# Altium PCB SensorenUndMPC555.PcbDoc
Units mm, origin at the board's own origin, x right, y up, seen from the top; angles counter-clockwise.
Board outline 130 x 110 mm, 2 copper layers (Top Layer, Bottom Layer); 66 components, 61 nets, 438 pads, 329 vias.
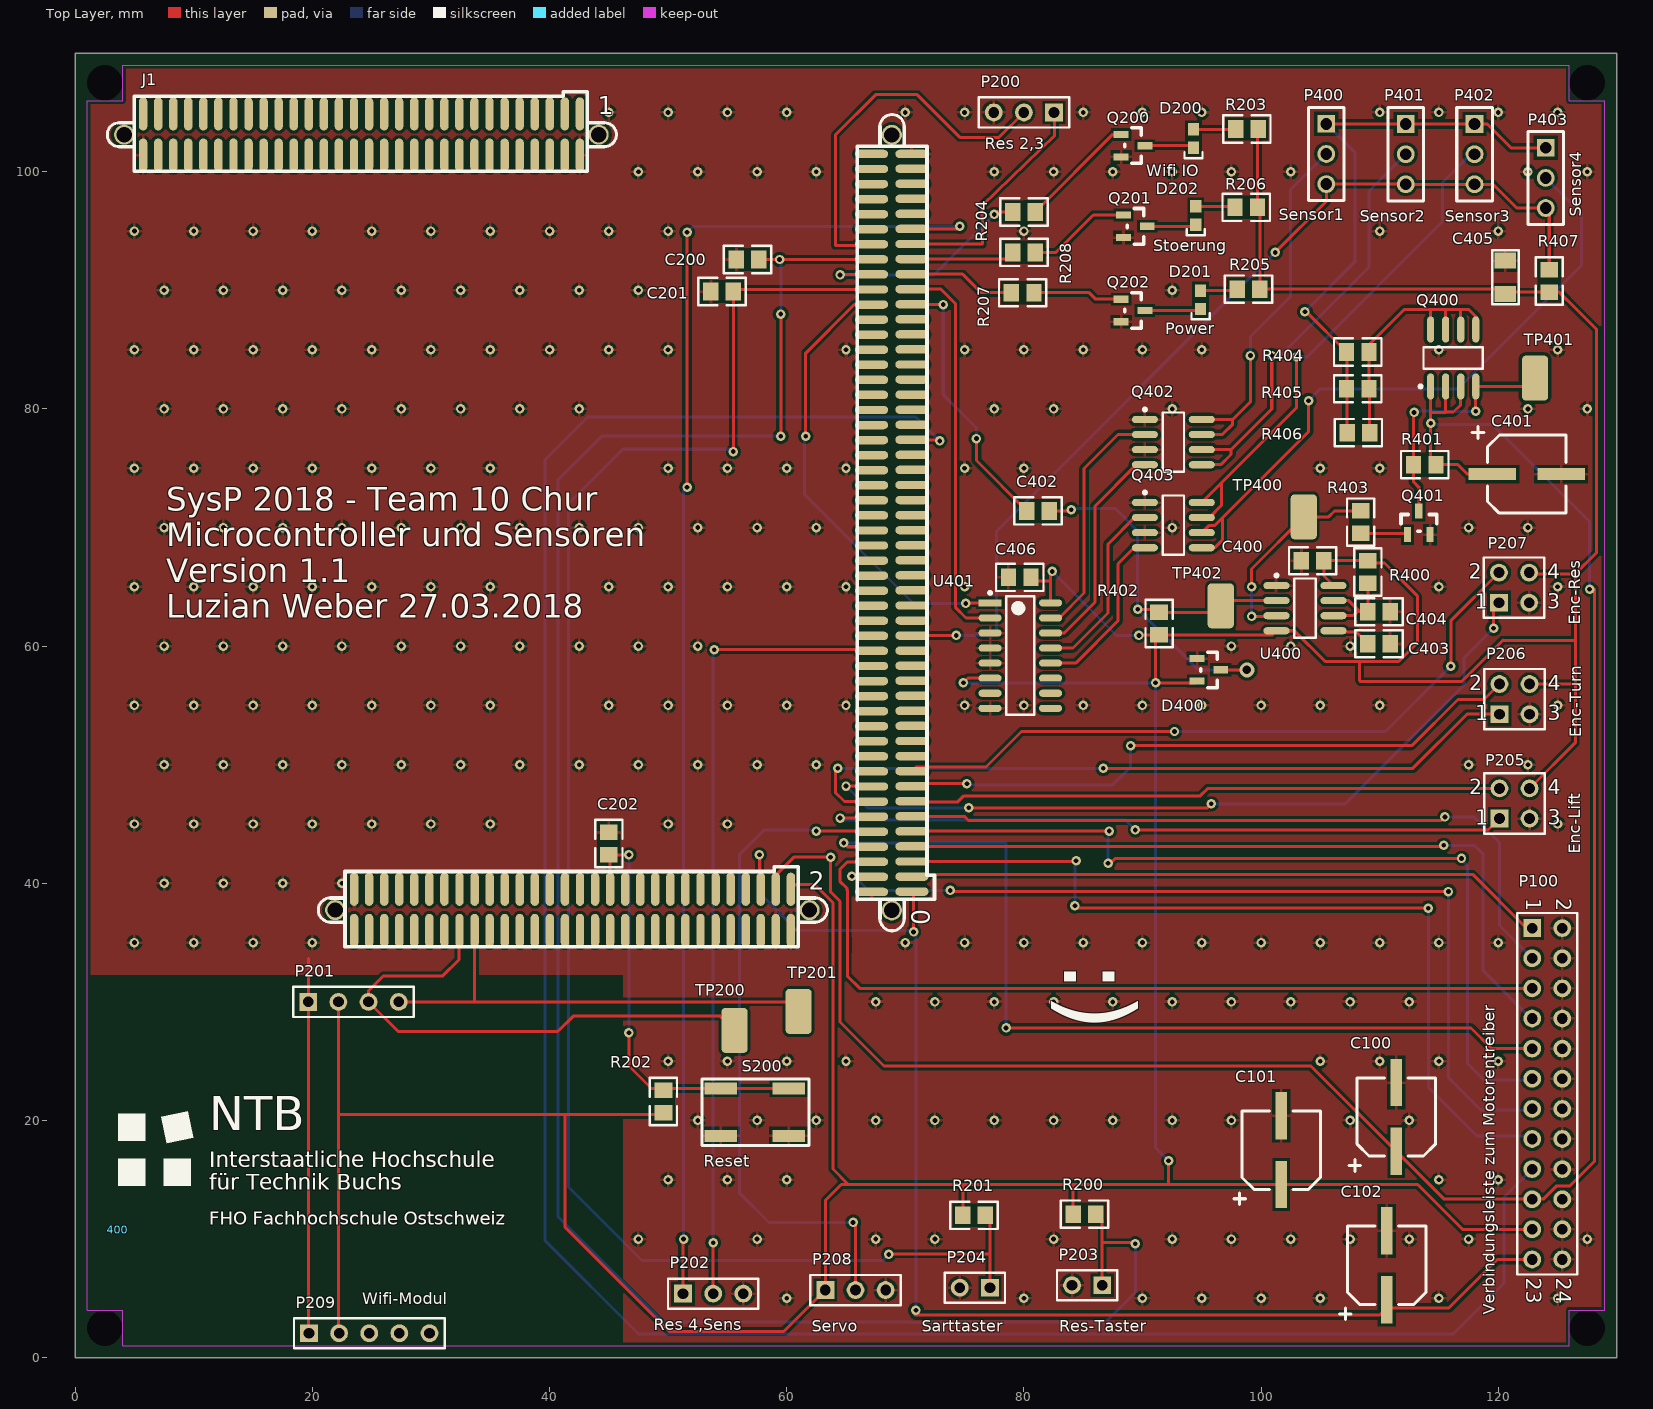
[diagram p0: Top Layer view]
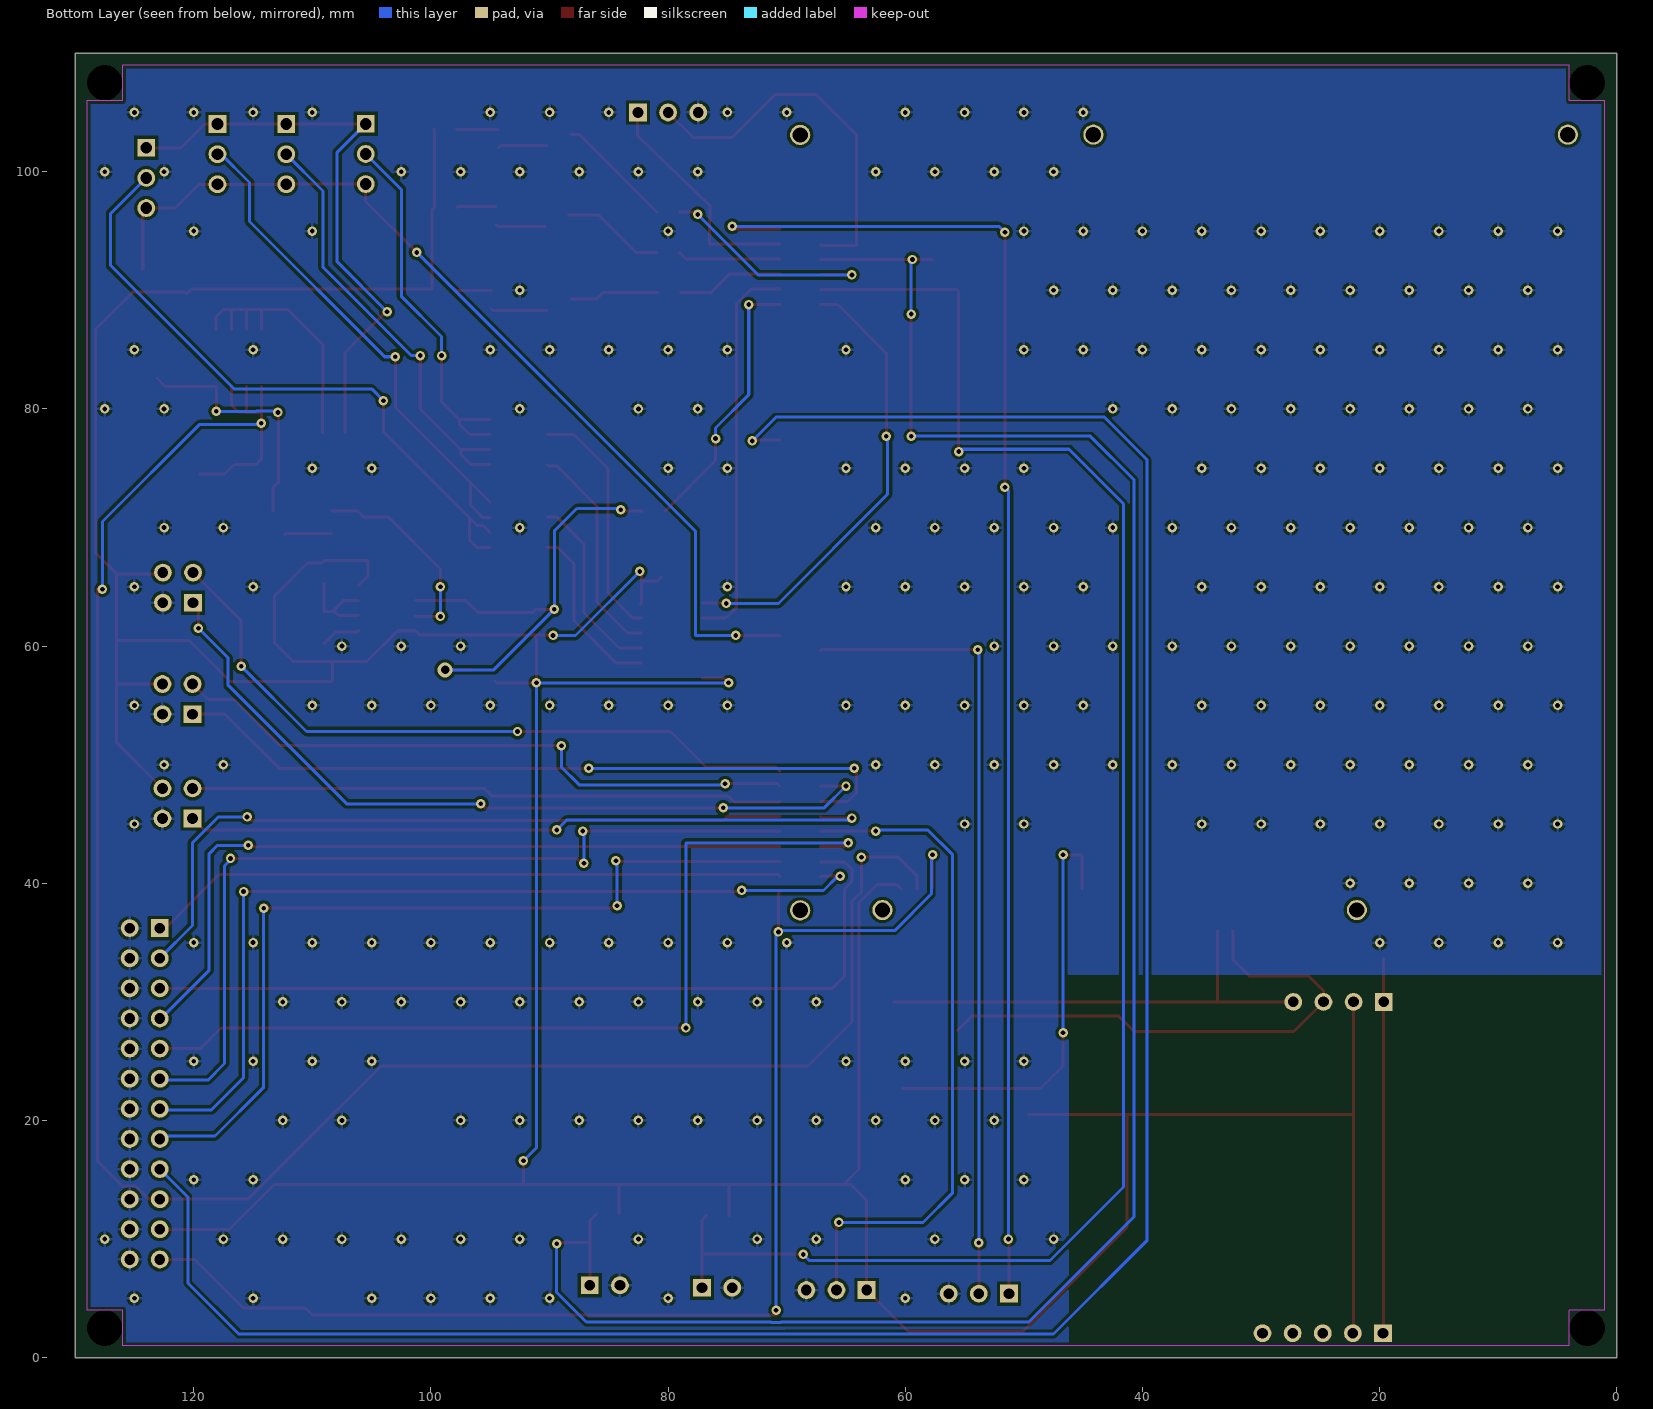
[diagram p1: Bottom Layer view, seen from below]
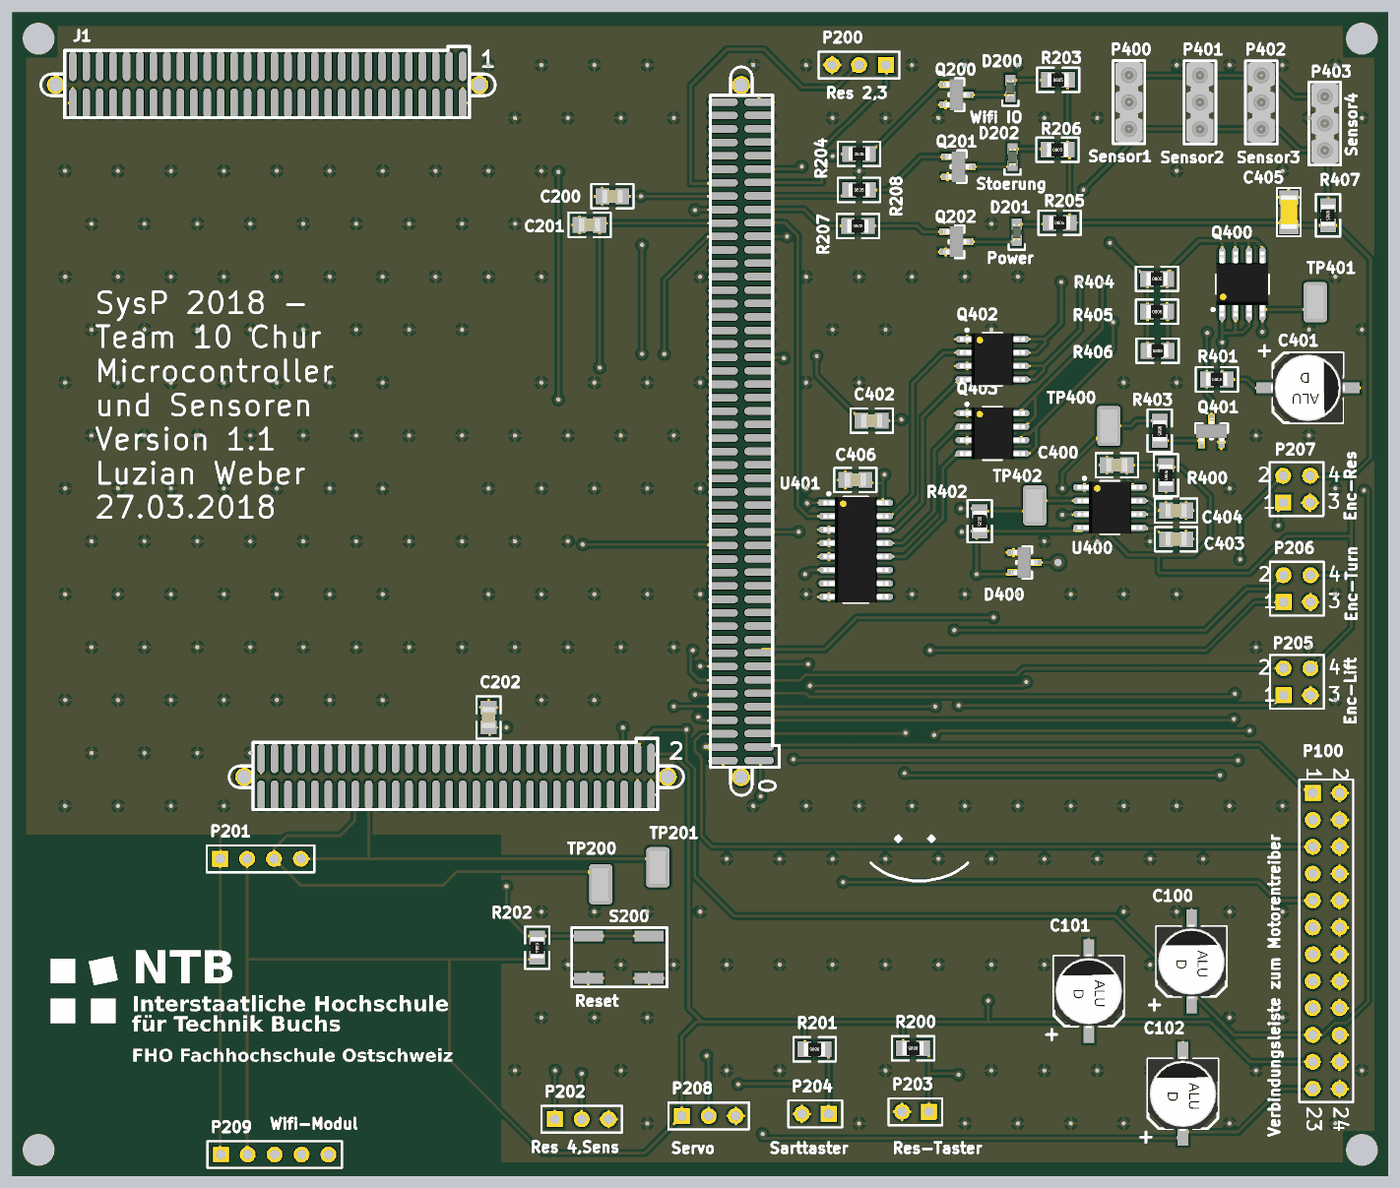
[diagram p2: 3D render of the assembled board from above, using the file's embedded part models]

## Layer stack, top to bottom
Top Solder: solder mask 0.0102, Solder Resist, Dk 3.5
Top Layer: signal copper 0.0356
Dielectric 1: dielectric 0.32, FR-4, Dk 4.8
Bottom Layer: signal copper 0.0356
Bottom Solder: solder mask 0.0102, Solder Resist, Dk 3.5

## Board outline
0,0 130,0 130,110 0,110

## Design rules (kind name [scope] priority, off if disabled: settings)
Clearance [All] p1: gap=0.254 ignorepadtopadclearanceinfootprint=FALSE except(0: Arc-Hole Track-Hole SMDPad-Hole THPad-Hole Via-Hole Fill-Hole Poly-Hole Region-Hole Text-Hole)
HoleSize [All] p1: absolutevalues=TRUE maxlimit=5 minlimit=0.025 maxpercent=80.000 minpercent=20.000
PolygonConnect [All] p1: connectstyle=Relief reliefconductorwidth=0.254 reliefentries=4 polygonreliefangle="90 Angle" airgapwidth=0.254
RoutingVias [All] p1: holewidth=0.711 width=1.27 viastyle="Through Hole" minholewidth=0.711 minwidth=1.27 maxholewidth=0.711 maxwidth=1.27
SolderMaskExpansion [All] p1: expansion=0.102
Width [All] p1: maxlimit=0.254 minlimit=0.254 preferedwidth=0.254
29 further rules are at their usual default settings.

## Classes and differential pairs
component class 4_Sensoren.SchDoc: 400 C400 C401 C402 C403 C404 C405 C406 D400 P400 P401 P402 P403 Q400 Q401 Q402 Q403 R400 R401 R402 R403 R404 R405 R406 R407 TP400 TP401 TP402 U400 U401
component class TopSheet: C100 C101 C102 P100
component class 2_MPC555.SchDoc: C200 C201 C202 D200 D201 D202 J1 J? P200 P201 P202 P203 P204 P205 P206 P207 P208 P209 Q200 Q201 Q202 R200 R201 R202 R203 R204 R205 R206 R207 R208 S200 TP200 TP201

## Components (designator, comment, footprint, x,y, rotation, side; value= is the part's Value field where it differs from the comment)
400 "NTB Logo Medium" "NTB Logo Medium" 3.6,10.8 r0 top
C100 "AVE476M16D16T-F" "CDE_CAP AVE CODE D_H" 111.4,20.3 r0 top value=47uF
C101 "AVE476M16D16T-F" "CDE_CAP AVE CODE D_H" 101.7,17.5 r0 top value=47uF
C102 "AVE476M16D16T-F" "CDE_CAP AVE CODE D_H" 110.6,7.8 r0 top value=47uF
C200 "100nF" CAP-0805[2012] 56.7,92.6 r0 top
C201 "100nF" CAP-0805[2012] 54.55,89.9 r0 top
C202 "100nF" CAP-0805[2012] 45,43.35 r270 top
C400 "100nF" CAP-0805[2012] 104.35,67.2 r180 top
C401 "AVE476M16D16T-F" "CDE_CAP AVE CODE D_H" 122.4,74.5 r270 top value=47uF
C402 "1nF" CAP-0805[2012] 81.2,71.4 r0 top
C403 "100nF" CAP-0805[2012] 109.95,60.2 r0 top
C404 "10nF" CAP-0805[2012] 109.95,62.9 r0 top
C405 "10uF" CAP-1206[3216] 120.6,91.1 r90 top
C406 "100nF" CAP-0805[2012] 79.65,65.8 r180 top
D200 "LTST-C190GKT" "LED 0603 green" 94.3,102.8 r90 top
D201 "LTST-C190GKT" "LED 0603 green" 94.9,89.2 r90 top
D202 "LTST-C190GKT" "LED 0603 green" 94.5,96.3 r90 top
D400 "BAT721S" SOT-23 95.6,58 r90 top
J1 "MPC555 Headerboard" "MPC555 Headerboard SMT" 70.561,39.297 r270 top
P100 "Header 12X2" HDR2X12 122.86,36.22 r270 top
P200 "Header 3" HDR1X3 82.54,105 r180 top
P201 "WIFI_A" HDR1X4 19.66,30 r0 top
P202 "Header 3" HDR1X3 51.26,5.4 r0 top
P203 "Header 2" HDR1X2 86.6,6.1 r180 top
P204 "Header 2" HDR1X2 77.14,5.9 r180 top
P205 "Header 2X2" HDR2X2 120.1,45.46 r0 top
P206 "Header 2X2" HDR2X2 120.1,54.26 r0 top
P207 "Header 2X2" HDR2X2 120.06,63.66 r0 top
P208 "Header 3" HDR1X3 63.26,5.7 r0 top
P209 "WIFI_B" HDR1X5 19.72,2.06 r0 top
P400 "3 Pin Header Buchse" "3PIN HEADER SOCKET 2.54MM" 105.5,104.02 r90 top
P401 "3 Pin Header Buchse" "3PIN HEADER SOCKET 2.54MM" 112.2,104 r90 top
P402 "3 Pin Header Buchse" "3PIN HEADER SOCKET 2.54MM" 118,104 r90 top
P403 "3 Pin Header Buchse" "3PIN HEADER SOCKET 2.54MM" 124,102 r90 top
Q200 "BC846B-7-F" SOT-23 89.2,102.2 r90 top
Q201 "BC846B-7-F" SOT-23 89.4,95.4 r90 top
Q202 "BC846B-7-F" SOT-23 89.2,88.3 r90 top
Q400 "IRF7204PBF" SOIC-8 116.2,84.3 r90 top
Q401 "BC846B-7-F" SOT-23 113.3,70.4 r180 top
Q402 "IRF7311PBF" SOIC-8 92.6,77.2 r0 top
Q403 "IRF7311PBF" SOIC-8 92.6,70.2 r0 top
R200 "10k" RES-0805[2012] 85.1,12.1 r180 top
R201 "10k" RES-0805[2012] 75.8,12 r180 top
R202 "10k" RES-0805[2012] 49.6,21.6 r270 top
R203 "1k" RES-0805[2012] 98.8,103.6 r0 top value=10k
R204 "10k" RES-0805[2012] 80,96.6 r0 top
R205 "1k" RES-0805[2012] 98.95,90.1 r0 top value=10k
R206 "1k" RES-0805[2012] 98.75,97 r0 top value=10k
R207 "10k" RES-0805[2012] 79.9,89.8 r0 top
R208 "10k" RES-0805[2012] 80,93.2 r0 top
R400 "16k" RES-0805[2012] 109,66.25 r90 top
R401 "1k" RES-0805[2012] 113.8,75.3 r0 top
R402 "4k3" RES-0805[2012] 91.4,61.9 r270 top
R403 "10k" RES-0805[2012] 108.4,70.45 r270 top
R404 "10k" RES-0805[2012] 108.15,84.8 r0 top
R405 "10k" RES-0805[2012] 108.15,81.7 r0 top
R406 "10k" RES-0805[2012] 108.2,78 r0 top
R407 "510R" RES-0805[2012] 124.3,90.8 r270 top
S200 "SW-SPST" B3SE-1002P 57.3,20.7 r0 top
TP200 "Testpoint SMD 1206" TP-SMD-1206 55.6,27.6 r90 top
TP201 "Testpoint SMD 1206" TP-SMD-1206 61,29.2 r90 top
TP400 "Testpoint SMD 1206" TP-SMD-1206 103.6,70.9 r90 top
TP401 "Testpoint SMD 1206" TP-SMD-1206 123.1,82.6 r90 top
TP402 "Testpoint SMD 1206" TP-SMD-1206 96.6,63.4 r90 top
U400 "ICM7555" SOIC-8 103.7,63.2 r0 top
U401 "74HC237D,653" SOIC-16 79.7,59.2 r0 top

## Footprints (in the part's own frame and the unit in brackets; to place one, negate y for a bottom-side part, rotate by r counter-clockwise, add the part's x,y. Pads: shape width x height; smd on the part's side, far side on the other; paste and mask are expansions set on the pad)
"3PIN HEADER SOCKET 2.54MM" [mm]
  rect 1.5x1.5 hole 1 paste-0.002 mask+0.07: 1(0.02,0)
  round 1.5 hole 1 paste-0.002 mask+0.07: 2(-2.52,0) 3(-5.06,0)
  silkscreen extent -6.46,-1.5 1.4,1.5, body extent -6.33,-1.27 1.29,1.27, height 3.8
B3SE-1002P [mm]
  rect 2.75x1 smd: 1(-2.875,-2) 1(2.875,-2) 2(-2.875,2) 2(2.875,2)
  silkscreen extent -4.44,-2.79 4.57,2.79
CAP-0805[2012] [mm]
  rect 1.3x1.5 smd: 1(-0.95,0) 2(0.95,0)
  silkscreen extent -2,-1.15 2,1.15, body extent -1,-0.62 1,0.63, height 0.6
CAP-1206[3216] [mm]
  rect 1.35x1.8 smd: 1(-1.4,0) 2(1.4,0)
  silkscreen extent -2.29,-1.12 2.29,1.12, body extent -1.6,-0.8 1.6,0.8, height 1.8
"CDE_CAP AVE CODE D_H" [mm]
  rect 1x4 smd paste-0.002 mask+0.07: 1(0,-2.9) 2(0,2.9)
  silkscreen extent -4,-4.6 3.29,3.3, body extent -3.31,-3.5 3.29,3.5
HDR1X2 [mm] "Connector; Header; 2 Position"
  rect 1.5x1.5 hole 0.9: 1(0,0)
  round 1.5 hole 0.9: 2(2.54,0)
  silkscreen extent -1.27,-1.27 3.81,1.27
HDR1X3 [mm] "Connector; Header; 3 Position"
  rect 1.5x1.5 hole 0.9: 1(0,0)
  round 1.5 hole 0.9: 2(2.54,0) 3(5.08,0)
  silkscreen extent -1.27,-1.27 6.35,1.27
HDR1X4 [mm] "Connector; Header; 4 Position"
  rect 1.5x1.5 hole 0.9: 1(0,0)
  round 1.5 hole 0.9: 2(2.54,0) 3(5.08,0) 4(7.62,0)
  silkscreen extent -1.27,-1.27 8.89,1.27
HDR1X5 [mm] "Connector; Header; 5 Position"
  rect 1.5x1.5 hole 0.9: 1(0,0)
  round 1.5 hole 0.9: 2(2.54,0) 3(5.08,0) 4(7.62,0) 5(10.16,0)
  silkscreen extent -1.27,-1.27 11.43,1.27
HDR2X2 [mm] "Connector; Header; 2x2 Position"
  rect 1.5x1.5 hole 0.9: 1(0,0)
  round 1.5 hole 0.9: 2(0,2.54) 3(2.54,0) 4(2.54,2.54)
  silkscreen extent -1.27,-1.27 3.81,3.81
HDR2X12 [mm] "Connector; Header; 12x2 Position"
  rect 1.5x1.5 hole 0.9: 1(0,0)
  round 1.5 hole 0.9: 2(0,2.54) 3(2.54,0) 4(2.54,2.54) 5(5.08,0) 6(5.08,2.54) 7(7.62,0) 8(7.62,2.54) 9(10.16,0) 10(10.16,2.54) 11(12.7,0) 12(12.7,2.54) 13(15.24,0) 14(15.24,2.54) 15(17.78,0) 16(17.78,2.54) 17(20.32,0) 18(20.32,2.54) 19(22.86,0) 20(22.86,2.54) 21(25.4,0) 22(25.4,2.54) 23(27.94,0) 24(27.94,2.54)
  silkscreen extent -1.27,-1.27 29.21,3.81
"LED 0603 green" [mm]
  rect 1.05x0.95 smd: 1(-0.775,0) 2(0.775,0)
  silkscreen extent -1.65,-0.76 -1.14,0.76, body extent -0.81,-0.4 0.81,0.4, height 0.6
"MPC555 Headerboard SMT" [mil] "Connectors for NTB MPC555 Header Board (SMT)"
  oval 28x110 smd: 1(0,0) 2(1,-134) 3(-50,0) 4(-49,-134) 5(-100,0) 6(-99,-134) 7(-150,0) 8(-149,-134) 9(-200,0) 10(-199,-134) 11(-250,0) 12(-249,-134) 13(-300,0) 14(-299,-134) 15(-350,0) 16(-349,-134) 17(-400,0) 18(-399,-134) 19(-450,0) 20(-449,-134) 21(-500,0) 22(-499,-134) 23(-550,0) 24(-549,-134) 25(-600,0) 26(-599,-134) 27(-650,0) 28(-649,-134) 29(-700,0) 30(-699,-134) 31(-750,0) 32(-749,-134) 33(-800,0) 34(-799,-134) 35(-850,0) 36(-849,-134) 37(-900,0) 38(-899,-134) 39(-950,0) 40(-949,-134) 41(-1000,0) 42(-999,-134) 43(-1050,0) 44(-1049,-134) 45(-1100,0) 46(-1099,-134) 47(-1150,0) 48(-1149,-134) 49(-1200,0) 50(-1199,-134) 51(-1250,0) 52(-1249,-134) 53(-1300,0) 54(-1299,-134) 55(-1350,0) 56(-1349,-134) 57(-1400,0) 58(-1399,-134) 59(-1450,0) 60(-1449,-134) 61(-1500,0) 62(-1499,-134) 63(-1550,0) 64(-1549,-134) 65(-1600,0) 66(-1599,-134) 67(-1650,0) 68(-1649,-134) 69(-1700,0) 70(-1699,-134) 71(-1750,0) 72(-1749,-134) 73(-1800,0) 74(-1799,-134) 75(-1850,0) 76(-1849,-134) 77(-1900,0) 78(-1899,-134) 79(-1950,0) 80(-1949,-134) 81(-2000,0) 82(-1999,-134) 83(-2050,0) 84(-2049,-134) 85(-2100,0) 86(-2099,-134) 87(-2150,0) 88(-2149,-134) 89(-2200,0) 90(-2199,-134) 91(-2250,0) 92(-2249,-134) 93(-2300,0) 94(-2299,-134) 95(-2350,0) 96(-2349,-134) 97(-2400,0) 98(-2399,-134) 99(-2449,0) 100(-2449,-134)
  oval 110x28 smd: 101(-2582,-1102.36) 102(-2445,-1102.36) 103(-2582,-1152.36) 104(-2445,-1152.36) 105(-2582,-1202.36) 106(-2445,-1202.36) 107(-2582,-1252.36) 108(-2445,-1252.36) 109(-2582,-1302.36) 110(-2445,-1302.36) 111(-2582,-1352.36) 112(-2445,-1352.36) 113(-2582,-1402.36) 114(-2445,-1402.36) 115(-2582,-1452.36) 116(-2445,-1452.36) 117(-2582,-1502.36) 118(-2445,-1502.36) 119(-2582,-1552.36) 120(-2445,-1552.36) 121(-2582,-1602.36) 122(-2445,-1602.36) 123(-2582,-1652.36) 124(-2445,-1652.36) 125(-2582,-1702.36) 126(-2445,-1702.36) 127(-2582,-1752.36) 128(-2445,-1752.36) 129(-2582,-1802.36) 130(-2445,-1802.36) 131(-2582,-1852.36) 132(-2445,-1852.36) 133(-2582,-1902.36) 134(-2445,-1902.36) 135(-2582,-1952.36) 136(-2445,-1952.36) 137(-2582,-2002.36) 138(-2445,-2002.36) 139(-2582,-2052.36) 140(-2445,-2052.36) 141(-2582,-2102.36) 142(-2445,-2102.36) 143(-2582,-2152.36) 144(-2445,-2152.36) 145(-2582,-2202.36) 146(-2445,-2202.36) 147(-2582,-2252.36) 148(-2445,-2252.36) 149(-2582,-2302.36) 150(-2445,-2302.36) 151(-2582,-2352.36) 152(-2445,-2352.36) 153(-2582,-2402.36) 154(-2445,-2402.36) 155(-2582,-2452.36) 156(-2445,-2452.36) 157(-2582,-2502.36) 158(-2445,-2502.36) 159(-2582,-2552.36) 160(-2445,-2552.36) 201(-8,-402) 202(129,-402) 203(-8,-452) 204(129,-452) 205(-8,-502) 206(129,-502) 207(-8,-552) 208(129,-552) 209(-8,-602) 210(129,-602) 211(-8,-652) 212(129,-652) 213(-8,-702) 214(129,-702) 215(-8,-752) 216(129,-752) 217(-8,-802) 218(129,-802) 219(-8,-852) 220(129,-852) 221(-8,-902) 222(129,-902) 223(-8,-952) 224(129,-952) 225(-8,-1002) 226(129,-1002) 227(-8,-1052) 228(129,-1052) 229(-8,-1102) 230(129,-1102) 231(-8,-1152) 232(129,-1152) 233(-8,-1202) 234(129,-1202) 235(-8,-1252) 236(129,-1252) 237(-8,-1302) 238(129,-1302) 239(-8,-1352) 240(129,-1352) 241(-8,-1402) 242(129,-1402) 243(-8,-1452) 244(129,-1452) 245(-8,-1502) 246(129,-1502) 247(-8,-1552) 248(129,-1552) 249(-8,-1602) 250(129,-1602) 251(-8,-1652) 252(129,-1652) 253(-8,-1702) 254(129,-1702) 255(-8,-1752) 256(129,-1752) 257(-8,-1802) 258(129,-1802) 259(-8,-1852) 260(129,-1852)
  round 66.93 hole 51.18: ""(-2513,-1040.36) ""(-2513,-2615.36) ""(-2512,-67) ""(61,-340) ""(61,-1915) ""(62,-67)
  silkscreen extent -2656,-2671 183,75, body extent -2697,-2697 236,98, height 295
"NTB Logo Medium" [mm]
  silkscreen extent 0.02,3.66 6.39,10
RES-0805[2012] [mm]
  rect 1.3x1.5 smd: 1(-0.95,0) 2(0.95,0)
  silkscreen extent -2,-1.15 2,1.15, body extent -1,-0.62 1,0.63, height 0.6
SOIC-8 [mm]
  oval 2.2x0.6 smd: 1(-2.4,1.905) 2(-2.4,0.635) 3(-2.4,-0.635) 4(-2.4,-1.905) 5(2.4,-1.905) 6(2.4,-0.635) 7(2.4,0.635) 8(2.4,1.905)
  silkscreen extent -2.52,-2.5 0.9,2.88, body extent -3.07,-2.44 3.07,2.45, height 1.76
SOIC-16 [mm]
  rect 1.95x0.6 smd: 1(-2.55,4.445)
  oval 1.95x0.6 smd: 2(-2.55,3.175) 3(-2.55,1.905) 4(-2.55,0.635) 5(-2.55,-0.635) 6(-2.55,-1.905) 7(-2.55,-3.175) 8(-2.55,-4.445) 9(2.55,-4.445) 10(2.55,-3.175) 11(2.55,-1.905) 12(2.55,-0.635) 13(2.55,0.635) 14(2.55,1.905) 15(2.55,3.175) 16(2.55,4.445)
  silkscreen extent -2.67,-5 1.18,5.42, body extent -3.07,-4.98 3.07,4.98, height 1.73
SOT-23 [mm]
  rect 0.61x1.26 smd paste-0.05: 1(0.95,1) 2(-0.95,1) 3(0,-1)
  silkscreen extent -1.5,-0.7 1.5,0.7, body extent -1.45,-1.21 1.45,1.21, height 0.98
TP-SMD-1206 [mm]
  rrect30% 3.8x2.2 smd: 1(0,0)
  body extent -1.6,-0.81 1.6,0.81, height 2.22

## Part data
C100 C101 C102 C401: library part "ELKO 47uF 16V", "ELKO, 47uF, 16V, CDE_AVE476M16D16T-F_AVE CODE D", Distributor PartNr=598-AVE476M16D16T-F, Manufacturer="Cornell Dubilier", ValueAddon="16V ±20 %", #Class=PASSIVE, #ClassSub=CAPACITOR, ClassName=Connect_Full, ComponentLink1Description="Manufacturer Link", ComponentLink2Description=Datasheet, ComponentLink2URL=http://www.cde.com/catalogs/AVE.pdf, ComponentLink3Description="Packaging Specification", Distributor=Mouser, Manufacturer PartNr=AVE476M16D16T-F, Published=20121220, Publisher="Stefan Ursella, M.Eng", RefFootprint="CDE_CAP AVE CODE D", RefSchema="CDE_AVE476M16D16T-F_AVE CODE D"
C200 C201 C202 C400 C403 C406: library part "MLCC 0805 100n 50V", "100n 50V X7R MLCC 0805 (1608 Metric)", Case-EIA=0803, Case-Metric=2013, Rated Voltage=50V, Temperature Characteristics EIA=X7R, Temperature Range EIA=-55C/+125C, Tolerance=10%, ValAddon="50V, 10%"
C402: library part "MLCC 0805 1n 16V", "MLCC - SMD/SMT 0805 1000pF 16V C0G 10%", Manufacturer=Vishay, Manufacturer PartNr=VJ0805A102KXJPW1BC, Supplier Part Number 1=77-VJ0805A102KXJPBC, ValueAddon="16V, 10%", ComponentLink1Description="Manufacturer Link", ComponentLink1URL=http://www.vishay.com/product?docid=28548, ComponentLink2Description=Datasheet, ComponentLink2URL=http://www.vishay.com/docs/28548/vjw1bcbascomseries.pdf, Published=18.12.14, Publisher=SCLM, RefFootprint=Gen_0805_H, RefSchema=Cap_1nF, Status=Lager?, Supplier 1=Mouser
C404: library part "MLCC 0805 10n 16V", "10n 16V X7R MLCC 0805", Manufacturer=AVX, Manufacturer PartNr=0805YC103KAT2A, ValueAddon="16V, 10%", ComponentLink1Description="Manufacturer Link", ComponentLink1URL=http://www.avx.com/prodinfo_productdetail.asp?I=45&K=search&C=&word=0805YC103KAT2A&form=number&Number=, ComponentLink2Description=Datasheet, ComponentLink2URL=http://www.farnell.com/datasheets/1679506.pdf, Published=09.01.15, Publisher=SCLM, Status=LAger?
C405: library part "MLCC 1206 10u 16V", "10u 16V X7R MLCC 1206 (3016 Metric)", Case-EIA=1206, Case-Metric=3216, Rated Voltage=10V, Temperature Characteristics EIA=X7R, Temperature Range EIA=-55C/+125C, Tolerance=10%, ValAddon="16V, 10%"
D200 D201 D202: library part "LED Green", "LED SMD 0603 green 6mcd", Color=green, Forward Current=30mA, Forward Voltage=2.1V, ComponentLink1Description="Datasheet LTST-C190GKT", ComponentLink1URL=V:\Diodes\Lite-On-LTST-C190GKT.pdf, Spectrum=565nm
D400: library part BAT721S-SOT23, "NXP  BAT721S  SCHOTTKY-DIODE, 2FACH", Distributor PartNr=1081200, Manufacturer=NXP, ComponentLink1Description="Manufacturer Link", ComponentLink1URL=http://www.nxp.com/search?q=%09bat721s&type=keyword&rows=10, ComponentLink2Description=Datasheet, ComponentLink2URL=http://www.farnell.com/datasheets/453891.pdf, ComponentLink3Description="Packaging Specification", Distributor=Farnell, Manufacturer PartNr=BAT721S, Published=20150612, Publisher=SCNP, RefFootprint="CDE_CAP AVE CODE D", RefSchema="CDE_AVE476M16D16T-F_AVE CODE D"
J1: "NTB MPC555 Headerboard"
P100: "Header, 12-Pin, Dual row", LatestRevisionDate=17-Jul-2002, LatestRevisionNote="Re-released for DXP Platform.", Publisher="Altium Limited"
P200 P202 P208: "Header, 3-Pin", LatestRevisionDate=17-Jul-2002, LatestRevisionNote="Re-released for DXP Platform.", Publisher="Altium Limited"
P201: library part "Header 4", "Header, 4-Pin", LatestRevisionDate=17-Jul-2002, LatestRevisionNote="Re-released for DXP Platform.", Publisher="Altium Limited"
P203 P204: "Header, 2-Pin", LatestRevisionDate=17-Jul-2002, LatestRevisionNote="Re-released for DXP Platform.", Publisher="Altium Limited"
P205 P206 P207: "Header, 2-Pin, Dual row", LatestRevisionDate=17-Jul-2002, LatestRevisionNote="Re-released for DXP Platform.", Publisher="Altium Limited"
P209: library part "Header 5", "Header, 5-Pin", LatestRevisionDate=17-Jul-2002, LatestRevisionNote="Re-released for DXP Platform.", Publisher="Altium Limited"
P400 P401 P402 P403: "3 Pin Header 2.54mm Buchse", ComponentLink1Description="Manufacturer Link"
Q200 Q201 Q202 Q401: library part BC846B-SOT23, "NPN General-purpose Transistor", Distributor PartNr=1773617, Manufacturer="DIODES INC", #Class=SEMICONDUCTOR-TRANSISTOR, #ClassSub=BJT-NPN, ComponentLink1Description="Manufacturer Link", ComponentLink1URL=http://www.diodes.com/products/catalog/detail.php?item-id=6689&popup=datasheet, ComponentLink2Description=Datasheet, ComponentLink2URL=http://www.diodes.com/datasheets/ds11108.pdf, ComponentLink3Description="Packaging Specification", ComponentLink3URL=http://www.diodes.com/datasheets/ap02001.pdf, Distributor=Farnell, Manufacturer PartNr=BC846B-7-F, Published=17-Sep-2003, Publisher="Altium Limited", RefFootprint=DIODS_SOT23_1B2E3C_3_H, RefSchema=DIODS_BC846B-7-F_SOT23, Status=nLager
Q400: library part IRF7204, "High Power P-Kanal Mosfet", Manufacturer="International Rectifiers", Supplier Part Number 1=9103350, ComponentLink1Description="Manufacturer Link", ComponentLink1URL=http://www.irf.com/, ComponentLink2Description=Datasheet, ComponentLink2URL=http://www.irf.com/product-info/datasheets/data/irf7204.pdf, Manufacturer PartNr=IRF7204PBF, Published=8-Jun-2000, Publisher="Altium Limited", RefFootprint=IRF_SO8_H, RefSchema=IRF_IRF7204_SO-8, Status=nLager, Supplier 1=Farnell
Q402 Q403: library part IRF7311, "Dual N-Kanal Mosfet", Manufacturer="International Rectifier", Supplier Part Number 1=1013364, ComponentLink1Description="Manufacturer Link", ComponentLink1URL=http://www.irf.com/, ComponentLink2Description=Datasheet, ComponentLink2URL=http://www.irf.com/product-info/datasheets/data/irf7311.pdf, Manufacturer PartNr=IRF7311PBF, Published=8-Jun-2000, Publisher="Altium Limited", RefFootprint=IRF_SO8_H, RefSchema=IRF_IRF7311_SO-8, Status=nLager, Supplier 1=Farnell
R200 R201 R202 R203 R204 R205 R206 R207 R208 R400 R401 R402 R403 R404 R405 R406 R407: library part "RES 0805", "0805 (2013 Metric) 1/10 W 10K 1 Thick Film Chip Resistor", Case-EIA=0805, Case-Metric=2013, Power="1/10 W", Temp. Coefficent=±100ppm, Tolerance=1%, Technology=SMT
S200: "Single-Pole, Single-Throw Switch", LatestRevisionDate=17-Jul-2002, LatestRevisionNote="Re-released for DXP Platform.", PackageDescription="Switch; 2 Leads", PackageReference=SPST-2, Published=24-Mar-1999, Publisher="Altium Limited"
TP200 TP201 TP400 TP401 TP402: "Testpoint xSmall", Type="Standard (No BOM)"
U400: library part ICM7555-SOIC8, "General purpose CMOS timer", Manufacturer="National Semiconductor", Supplier Part Number 1=771-ICM7555, #Class=Analog, #SubClass="Timer Circuit", ComponentLink1Description=Datasheet, ComponentLink1URL=http://www.datasheetcatalog.org/datasheet/intersil/fn2867.pdf, ComponentLink2Description=Distributor, ComponentLink2URL=https://www.distrelec.ch/ishopWebFront/catalog/product.do/para/node/is/acaaabaaacaf/and/highlightNode/is/640145/and/id/is/01/and/series/is/1.html, Manufacturer PartNr=ICM7555, Published=15/04/2002, Publisher="Altium Hobart Technology Centre", RefFootprint=NXP_SO8(SOT96-1)_H, RefSchema=NXP_ICM7555_SO-8, Status=nLager, Supplier 1="Mouser Electronics"
U401: library part 74HC237D-SOIC16, "3-to-8 line decoder, demultiplexer, NXP, SO16", Manufacturer=NXP, Supplier Part Number 1=771-HC237D653, ComponentLink1Description="Manufacturer Link", ComponentLink1URL=http://www.nxp.com/products/logic/decoders_demultiplexers/74HC237D.html, ComponentLink2Description=Datasheet, ComponentLink2URL=http://www.nxp.com/documents/data_sheet/74HC237.pdf, Manufacturer PartNr=74HC237D,653, Published=28.11.2014, Publisher=SCLM, RefFootprint=NXP_SO16(SOT109-1)_H, RefSchema=NXP_74HC237D_SO-16, Status=nLager, Supplier 1="Mouser Electronics"

## Free pads (board coordinates)
  round 1.524 hole 3: 1(127.5,2.5) 1(127.5,107.5) 2(2.5,2.5) 3(2.5,107.5)

## Via types
v1: diameter 0.8, hole 0.4, Top Layer to Bottom Layer, tented both sides, 328 vias
v2: diameter 1.27, hole 0.711, Top Layer to Bottom Layer, tented both sides, 1 vias

## Nets (pads, with @x,y where several pads share a name; then routed paths per layer and width w, separated by ;. In a path a pad name is that pad's centre, name@x,y a point inside that pad or via, vN(x,y) a via of type N, cw(c..) or ccw(c..) an arc to the next point about the centre after c; other vN are vias at no path point)
3.3V: C102.1 J1.1 J1.205 P100.23 | length 110.1
  Top Layer w0.254: v1(57.7,42.4) 57.7,39.61 J1.205 ; J1.1 70.7,39.158 v1(70.7,35.9) ; v1(70.9,4) 70.9,3.7 70.8,3.6 110,3.6 110.6,4.2 115.84,4.2 119.92,8.28 P100.23
  Bottom Layer w0.254: 57.8,42 57.8,39.1 60.9,36 70.6,36 v1(70.7,35.9) 70.8,35.9 70.7,35.8 70.9,35.6 v1(70.9,4)
5V: C101.1 C400.1 C405.1 C406.1 D400.2 J1.201 P100.21 P201.2 P205.4 P206.4 P207.4 P208.1 P209.2 R200.2 R201.2 R202.2 R203.2 R205.2 R206.2 R400.2 R402.2 R407.2 U400.4 U400.8 U401.6 U401.16 | length 432.4
  Top Layer w0.254: P201.2 22.2,20.5 ; P209.2@22.24,2.6 22.2,2.64 22.2,20.5 ; R202.2@49.6,20.5 41.2,20.5 ; J1.201 60.766,39.916 62.342,39.916 63.9,38.358 63.9,15.9 65.2,14.6 ; R201.2@74.81,11.96 R201.2 74.85,14.55 74.9,14.6 ; v1(74.9,56.9) 75.295,57.295 U401.6 ; C406.1 80.9,65.5 82.25,65.5 ; U401.16@82.345,63.55 U401.16 82.25,65.5 ; v1(82.4,66.3) 82.25,66.15 82.25,65.5 ; R200.2 84.15,14.55 84.2,14.6 ; v1(89.7,60.9) 89.75,60.95 R402.2 ; v1(92.2,16.6) 92.2,14.6 ; D400.2 94.45,56.9 v1(91.1,56.9) 91.1,60.65 R402.2 ; R203.2 99.7,103.55 R206.2 99.9,96.8 R205.2 120.2,90.1 C405.1 120.75,89.85 R407.2 125.15,89.85 126.6,88.4 128.3,86.7 128.3,67.9 126.5,66.1 ; U400.8 105.3,65.905 C400.1 R400.2 109.2,67 110.4,67 113.2,64.2 113.2,60.3 111.6,58.7 108.3,58.7 ; P207.4 122.7,66.1 126.5,66.1 ; P205.4 126.5,51.86 126.5,56.8 ; P206.4 126.5,56.8 ; P100.21 116.98,10.82 113.2,14.6 C101.1 92.2,14.6 ; 22.2,20.5 41.2,20.5 ; 41.2,20.5 41.3,20.4 41.3,11 50.1,2.2 59.76,2.2 P208.1 63.26,13.26 64.6,14.6 65.2,14.6 ; 65.2,14.6 74.9,14.6 ; 74.9,14.6 84.2,14.6 ; 84.2,14.6 92.2,14.6 ; R402.2 100.955,60.95 U400.4 102.805,61.295 105.4,58.7 108.3,58.7 ; 108.3,58.7 108.3,57.1 108.4,57 116.9,57 120.4,60.5 120.416,60.484 126.484,60.484 126.5,60.5 ; 126.5,56.8 126.5,60.5 ; 126.5,60.5 126.5,66.1
  Bottom Layer w0.254: v1(74.9,56.9) v1(91.1,56.9) 91.1,17.7 v1(92.2,16.6) ; v1(82.4,66.3) 87.8,60.9 v1(89.7,60.9)
12V: C100.1 C401.1 J1.203 P100.19 Q400.1 Q400.2 Q400.3 R401.2 | length 181.9
  Top Layer w0.254: J1.203 59,39.58 59,40.6 60.6,42.2 v1(63.7,42.2) 63.7,39.277 64.5,38.477 64.5,28.3 68.2,24.6 104.2,24.6 C100.1 115.44,13.36 P100.19 123.801,13.36 124.932,14.491 126.05,14.491 128.1,16.541 128.1,64.8 v1(127.7,64.8) ; Q400.1 114.3,81.895 114.3,79.7 ; Q400.2 115.565,79.735 ; Q400.3 116.835,80.335 116.235,79.735 115.565,79.735 ; C401.1 117.4,74.5 116.6,75.3 R401.2 114.3,75.75 v1(114.3,78.8) 114.3,79.7 ; 114.3,79.7 115.6,79.7 115.565,79.735
  Bottom Layer w0.254: v1@63.7,42 63.8,42.1 v1(63.7,42.2) ; v1@114.3,78.7 v1(114.3,78.8) 114.4,78.7 119.5,78.7 127.7,70.5 v1(127.7,64.8)
Enc-A-Lift: J1.12 P205.1 | length 59.1
  Top Layer w0.254: v1(64.5,45.5) 67.036,45.5 J1.12 ; v1(89.4,44.5) 119.14,44.5 P205.1
  Bottom Layer w0.254: v1(64.5,45.5) 64.655,45.345 88.555,45.345 v1(89.4,44.5)
Enc-A-Res: J1.16 P207.1 | length 67.5
  Top Layer w0.254: v1(65,48.2) 67.119,48.2 J1.16 ; v1(75.361,46.361) 95.461,46.361 v1(95.8,46.7) ; v1(119.6,61.5) 119.6,63.2 P207.1
  Bottom Layer w0.254: v1(65,48.2) 66.839,46.361 v1(75.361,46.361) ; v1(95.8,46.7) 107.1,46.7 117.1,56.7 117.1,59 v1(119.6,61.5)
Enc-A-Turn: J1.14 P206.1 | length 63.2
  Top Layer w0.254: v1(64.3,49.7) 64.1,49.5 64.1,47.663 64.872,46.891 J1.14 ; v1(86.7,49.7) 112.8,49.7 117.36,54.26 P206.1
  Bottom Layer w0.254: v1(64.3,49.7) v1(86.7,49.7)
Enc-B-Lift: J1.13 P205.2 | length 50
  Top Layer w0.254: J1.13 70.609,46.869 74.432,46.869 74.94,47.377 94.877,47.377 95.5,48 P205.2
Enc-B-Res: J1.17 P207.2 | length 58.7
  Top Layer w0.254: J1.17 70.904,49.8 76.8,49.8 79.8,52.8 v1(92.7,52.8) ; v1(116,58.3) 116,62.14 P207.2
  Bottom Layer w0.254: v1(92.7,52.8) 110.5,52.8 v1(116,58.3)
Enc-B-Turn: J1.15 P206.2 | length 54.2
  Top Layer w0.254: J1.15 70.774,48.4 v1(75.2,48.4) ; v1(89,51.6) 112.7,51.6 116.6,55.5 118.8,55.5 P206.2
  Bottom Layer w0.254: v1(75.2,48.4) 75.3,48.3 87.5,48.3 89,49.8 v1(89,51.6)
GND: C100.2 C101.2 C102.2 C200.1 C201.1 C202.1 C400.2 C401.2 C403.2 C404.2 C405.2 C406.2 D400.1 J1.2 J1.99 J1.102 J1.160 J1.202 J1.204 J1.259 P100.2 P100.4 P100.6 P100.8 P100.10 P100.12 P100.14 P100.16 P100.18 P100.20 P100.22 P100.24 P200.3 P201.1 P202.3 P203.2 P204.2 P205.3 P206.3 P207.3 P208.3 P209.1 Q200.2 Q201.2 Q202.2 Q401.2 Q402.1 Q402.3 Q403.1 Q403.3 S200.1 U400.1 U401.3 U401.4 U401.5 U401.8 | length 31.6
  Top Layer w0.254: 19.66,33.64 P201.1 19.66,2.12 P209.1
  other v1: 60,5 80,5 90,5 95,5 100,5 105,5 115,5 125,5 47.5,10 57.5,10 67.5,10 72.5,10 82.5,10 92.5,10 97.5,10 102.5,10 107.5,10 112.5,10 117.5,10 127.5,10 50,15 55,15 60,15 115,15 120,15 52.5,20 57.5,20 62.5,20 67.5,20 72.5,20 77.5,20 82.5,20 87.5,20 92.5,20 97.5,20 107.5,20 112.5,20 50,25 55,25 60,25 65,25 105,25 110,25 115,25 120,25 67.5,30 72.5,30 77.5,30 82.5,30 87.5,30 92.5,30 97.5,30 102.5,30 107.5,30 112.5,30 5,35 10,35 15,35 20,35 70,35 75,35 80,35 85,35 90,35 95,35 100,35 105,35 110,35 115,35 120,35 7.5,40 12.5,40 17.5,40 22.5,40 5,45 10,45 15,45 20,45 25,45 30,45 35,45 50,45 55,45 125,45 7.5,50 12.5,50 17.5,50 22.5,50 27.5,50 32.5,50 37.5,50 42.5,50 47.5,50 52.5,50 57.5,50 62.5,50 117.5,50 122.5,50 5,55 10,55 15,55 20,55 25,55 30,55 35,55 45,55 50,55 55,55 60,55 65,55 75,55 80,55 85,55 90,55 95,55 100,55 105,55 110,55 125,55 7.5,60 12.5,60 17.5,60 22.5,60 27.5,60 32.5,60 37.5,60 42.5,60 47.5,60 52.5,60 97.5,60 102.5,60 107.5,60 5,65 10,65 15,65 20,65 25,65 30,65 35,65 45,65 50,65 55,65 60,65 65,65 75,65 115,65 125,65 7.5,70 12.5,70 17.5,70 22.5,70 27.5,70 32.5,70 37.5,70 42.5,70 47.5,70 52.5,70 57.5,70 62.5,70 92.5,70 117.5,70 122.5,70 5,75 10,75 15,75 20,75 25,75 30,75 35,75 50,75 55,75 60,75 65,75 75,75 80,75 105,75 110,75 7.5,80 12.5,80 17.5,80 22.5,80 27.5,80 32.5,80 37.5,80 42.5,80 77.5,80 82.5,80 92.5,80 122.5,80 127.5,80 5,85 10,85 15,85 20,85 25,85 30,85 35,85 40,85 45,85 50,85 65,85 75,85 80,85 85,85 90,85 95,85 115,85 125,85 7.5,90 12.5,90 17.5,90 22.5,90 27.5,90 32.5,90 37.5,90 42.5,90 47.5,90 92.5,90 5,95 10,95 15,95 20,95 25,95 30,95 35,95 40,95 45,95 50,95 80,95 110,95 120,95 47.5,100 52.5,100 57.5,100 62.5,100 77.5,100 82.5,100 87.5,100 92.5,100 97.5,100 102.5,100 122.5,100 127.5,100 45,105 50,105 55,105 60,105 70,105 75,105 85,105 90,105 95,105 110,105 115,105 120,105 125,105
LED-Power: J1.83 R207.1 | length 9
  Top Layer w0.254: J1.83 74.833,91.367 76.4,89.8 R207.1
LED-Störung: J1.85 R208.1 | length 8.7
  Top Layer w0.254: J1.85 78.487,92.637 R208.1
LED-Wifi-IO: J1.84 R204.1 | length 19.4
  Top Layer w0.254: v1(64.5,91.3) 64.541,91.341 J1.84 ; v1(77.5,96.4) 77.7,96.6 R204.1
  Bottom Layer w0.254: v1(64.5,91.3) 72.4,91.3 v1(77.5,96.4)
NetC202_2: C202.2 J1.225 R202.1 S200.2 | length 36.5
  Top Layer w0.254: J1.225 45.11,42.31 45.2,42.4 v1(46.7,42.4) ; v1(46.7,27.4) 46.7,24.6 48.6,22.7 54.425,22.7 S200.2@60.175,22.7
  Bottom Layer w0.254: v1(46.7,27.4) v1(46.7,42.4)
NetC402_1: C402.1 J1.79 | length 23
  Top Layer w0.254: J1.79 70.588,88.8 v1(73.2,88.8) ; v1(76,77.5) 76,75.65 C402.1
  Bottom Layer w0.254: v1(73.2,88.8) 73.2,81.2 76,78.4 v1(76,77.5)
NetC402_2: C402.2 D400.3 R402.1 TP402.1 U400.2 | length 40.6
  Top Layer w0.254: C402.2 83.9,71.4 v1(84,71.5) ; v1(89.6,63.1) 91.15,63.1 R402.1 96.05,62.85 TP402.1 97.035,63.835 U400.2 ; D400.3 v2(98.8,58)
  Bottom Layer w0.254: v1(84,71.5) 84.1,71.6 87.7,71.6 89.6,69.7 v1(89.6,63.1) 94.7,58 v2(98.8,58)
NetC403_1: C403.1 U400.5 | length 3.4
  Top Layer w0.254: U400.5 106.195,61.2 108,61.2 C403.1
NetC404_1: C404.1 R400.1 U400.6 U400.7 | length 8.1
  Top Layer w0.254: U400.6 107.765,62.565 108.1,62.9 108.329,62.9 ; U400.7 107.394,63.835 108.329,62.9 ; R400.1 C404.1 108.329,62.9
NetD200_1: D200.1 Q200.3 | length 4.2
  Top Layer w0.254: Q200.3 94.125,102.2 D200.1
NetD200_2: D200.2 R203.1 | length 3.6
  Top Layer w0.254: D200.2 97.825,103.575 R203.1
NetD201_1: D201.1 Q202.3 | length 4.8
  Top Layer w0.254: Q202.3 94.775,88.3 D201.1
NetD201_2: D201.2 R205.1 | length 3.2
  Top Layer w0.254: D201.2 97.875,89.975 R205.1
NetD202_1: D202.1 Q201.3 | length 4.2
  Top Layer w0.254: Q201.3 94.375,95.4 D202.1
NetD202_2: D202.2 R206.1 | length 3.3
  Top Layer w0.254: D202.2 97.725,97.075 R206.1
NetJ1_3: J1.3 P100.1 | length 54.3
  Top Layer w0.254: J1.3 70.754,40.76 117.84,40.76 122.38,36.22 P100.1
NetJ1_4: J1.4 P100.13 | length 76.4
  Top Layer w0.254: v1(65.5,40.6) 67.099,40.6 J1.4 ; v1(73.8,39.4) 73.9,39.3 v1(115.8,39.3)
  Bottom Layer w0.254: v1(65.5,40.6) 65.7,40.6 66.9,39.4 v1(73.8,39.4) ; v1(115.8,39.3) 115.8,23.6 118.5,20.9 P100.13@122.86,20.9
NetJ1_5: J1.5 P100.15 | length 73.3
  Top Layer w0.254: J1.5 84.337,41.837 v1(84.4,41.9) ; v1(84.3,38.1) 84.5,37.9 v1(114.1,37.9)
  Bottom Layer w0.254: v1(84.3,38.1) 84.3,41.8 v1(84.4,41.9) ; v1(114.1,37.9) 114.1,22.8 118.2,18.7 122.6,18.7 P100.15
NetJ1_6: J1.6 P100.5 | length 70.4
  Top Layer w0.254: J1.6 67.138,41.792 65.108,41.792 64.484,41.168 64.484,40.179 65.079,39.584 65.079,39.392 65.108,39.421 65.108,35.447 65.124,35.431 65.124,34.169 65.108,34.153 65.108,32.192 66.16,31.14 P100.5
NetJ1_7: J1.7 P100.7 | length 64.2
  Top Layer w0.254: J1.7 101.207,43.107 ; 101.2,43.1 101.207,43.107 ; v1(115.4,43.2) 115.307,43.107 101.207,43.107
  Bottom Layer w0.254: v1(115.4,43.2) 118,43.2 118.7,42.5 118.7,32.66 P100.7@122.86,28.5
NetJ1_8: J1.8 P100.9 | length 76.9
  Top Layer w0.254: v1(64.8,43.4) 65.119,43.081 J1.8 ; v1(78.5,27.8) 117.7,27.8 119.44,26.06 P100.9
  Bottom Layer w0.254: v1(64.8,43.4) 78.5,43.4 v1(78.5,27.8)
NetJ1_9: J1.9 P100.11 | length 73.1
  Top Layer w0.254: J1.9 70.584,44.4 v1(87.2,44.4) ; v1(87.1,41.7) 87.2,41.8 87.3,41.7 87.7,42.1 v1(116.9,42.1) ; P100.11@122.74,23.4 P100.11
  Bottom Layer w0.254: v1(87.1,41.7) 87.1,44.3 v1(87.2,44.4) ; v1@116.834,42.034 117.4,41.468 117.4,24.8 118.8,23.4 P100.11@122.86,23.4
NetJ1_11: J1.11 P100.3 | length 61.6
  Top Layer w0.254: J1.11 74.971,45.647 75.317,45.3 115.2,45.3 v1(115.5,45.6)
  Bottom Layer w0.254: v1(115.5,45.6) 117.921,45.6 120.1,43.421 120.1,36.44 P100.3
NetJ1_35: J1.35 P400.3 P401.3 P402.3 P403.3 R407.1 | length 81.4
  Top Layer w0.254: J1.35 74.287,60.887 v1(74.3,60.9) ; v1(101.2,93.2) 105.5,97.5 P400.3 112.18,98.96 P401.3 P402.3 119.56,98.94 121.56,96.94 P403.3 124.3,96.64 R407.1
  Bottom Layer w0.254: v1(74.3,60.9) 77.7,60.9 77.7,69.7 v1(101.2,93.2)
NetJ1_61: J1.61 P100.17 | length 200.3
  Top Layer w0.254: J1.61 72.803,77.397 v1(72.9,77.3)
  Bottom Layer w0.254: v1(72.9,77.3) 70.9,79.3 43.2,79.3 39.6,75.7 39.6,9.9 47.5,2 70.045,2 70.069,1.976 116.176,1.976 120.5,6.3 120.5,13.54 P100.17
NetJ1_80: J1.80 U401.1 | length 38.7
  Top Layer w0.254: v1(61.6,77.7) 61.6,84.7 65.701,88.801 J1.80 ; v1(75.1,63.6) 75.145,63.645 U401.1
  Bottom Layer w0.254: v1(61.6,77.7) 61.5,77.6 61.5,72.8 70.7,63.6 v1(75.1,63.6)
NetJ1_81: J1.81 U401.2 | length 33.1
  Top Layer w0.254: J1.81 73.008,90.097 74.216,88.889 74.216,63.284 75.125,62.375 U401.2
NetP400_1: P400.1 P401.1 P402.1 P403.1 R404.1 R405.1 R406.1 | length 49.6
  Top Layer w0.254: v1(103.7,88.2) 103.8,88.2 R404.1 107.25,84.75 R406.1 ; P400.1 105.52,104.02 P401.1 P402.1 119.08,104.02 121.08,102.02 P403.1
  Bottom Layer w0.254: v1(103.7,88.2) 107.9,92.4 107.9,101.64 P400.1
NetP400_2: P400.2 Q402.7 Q402.8 | length 31.6
  Top Layer w0.254: Q402.7 96.735,77.835 97.605,78.705 97.605,79.105 ; Q402.8 97.605,79.105 ; v1(99.1,84.5) 99.1,80.6 97.605,79.105
  Bottom Layer w0.254: v1(99.1,84.5) 99.1,86.1 102.5,89.5 102.5,98.5 P400.2
NetP401_2: P401.2 Q402.5 Q402.6 | length 37.2
  Top Layer w0.254: Q402.5 96.595,75.295 97.465,76.165 97.465,76.565 ; Q402.6 97.465,76.565 ; v1(100.9,84.5) 100.9,80 97.465,76.565
  Bottom Layer w0.254: v1(100.9,84.5) 101.663,84.5 109.1,91.937 109.1,98.38 P401.2
NetP402_2: P402.2 Q403.7 Q403.8 | length 43.6
  Top Layer w0.254: Q403.7 95.635,70.835 96.648,71.847 96.648,73.752 ; Q403.8 96.648,73.752 ; v1(103,84.4) 103,81.137 102.984,81.121 102.984,80.089 96.648,73.752 ; P402.2@117.92,101.4 P402.2
  Bottom Layer w0.254: v1(103,84.4) 103.9,84.4 115.3,95.8 115.3,99.1 P402.2@117.8,101.6
NetP403_2: P403.2 Q403.5 Q403.6 | length 55.5
  Top Layer w0.254: Q403.5 96.095,68.295 96.728,68.928 96.728,70.8 ; Q403.6 95.589,70.154 96.082,70.154 96.728,70.8 ; v1(104,80.7) 104,78.072 96.728,70.8 ; P403.2 P403.2@124.12,99.6
  Bottom Layer w0.254: v1(104,80.7) 105,81.7 116.6,81.7 127,92.1 127,96.48 P403.2
NetQ200_1: Q200.1 R204.2 | length 10
  Top Layer w0.254: R204.2 87.5,103.15 Q200.1
NetQ201_1: Q201.1 R208.2 | length 8.8
  Top Layer w0.254: R208.2 82.7,93.2 85.85,96.35 Q201.1
NetQ202_1: Q202.1 R207.2 | length 7.6
  Top Layer w0.254: R207.2 85.5,89.8 86.05,89.25 Q202.1
NetQ400_4: Q400.4 Q401.3 R401.1 TP401.1 | length 21.1
  Top Layer w0.254: v1(112.9,79.7) 112.85,79.65 R401.1 112.85,73.85 113.3,73.4 Q401.3 ; v1(118.1,79.8) 118.1,81.895 Q400.4 122.4,81.9 TP401.1
  Bottom Layer w0.254: v1(112.9,79.7) 113.016,79.816 114.721,79.816 114.737,79.8 v1(118.1,79.8)
NetQ400_5: Q400.5 Q400.6 Q400.7 Q400.8 R404.2 R405.2 R406.2 | length 24.1
  Top Layer w0.254: R406.2 109.15,81.65 R405.2 R404.2 109.1,85.4 112.1,88.4 114.295,88.4 ; Q400.8 114.295,88.4 ; Q400.7 115.548,86.717 115.548,88.4 ; Q400.6 116.8,86.735 116.8,88.4 ; Q400.5 118.105,87.795 117.5,88.4 116.8,88.4 ; 114.295,88.4 115.548,88.4 ; 115.548,88.4 116.8,88.4
NetQ401_1: Q401.1 R403.2 | length 4
  Top Layer w0.254: R403.2 112.25,69.5 Q401.1
NetQ402_2: Q402.2 U401.15 | length 20.5
  Top Layer w0.254: U401.15 82.975,62.375 85.075,64.475 85.075,74.975 87.935,77.835 Q402.2
NetQ402_4: Q402.4 U401.14 | length 18.6
  Top Layer w0.254: U401.14 83.405,61.105 86,63.7 86,71.8 89.4,75.2 90.105,75.2 Q402.4
NetQ403_2: Q403.2 U401.13 | length 16
  Top Layer w0.254: U401.13 84.135,59.835 87.1,62.8 87.1,68.6 89.4,70.9 90.135,70.9 Q403.2
NetQ403_4: Q403.4 U401.12 | length 14.8
  Top Layer w0.254: U401.12 84.365,58.565 87.935,62.135 87.935,66.935 89.335,68.335 90.16,68.335 Q403.4
NetR403_1: R403.1 TP400.1 U400.3 | length 17.4
  Top Layer w0.254: v1(99.2,62.5) 101.235,62.5 U400.3 ; v1(99.2,65) 99.2,66.5 TP400.1 105.7,70.9 106.2,71.4 R403.1
  Bottom Layer w0.254: v1(99.2,62.5) v1(99.2,65)
Res-Sens: J1.34 P202.2 | length 67.6
  Top Layer w0.254: P202.2 v1(53.8,9.7) ; v1(53.9,59.7) 67.049,59.7 J1.34
  Bottom Layer w0.254: v1(53.8,9.7) 53.8,59.6 v1(53.9,59.7)
Reserve-1: C200.2 J1.86 P203.1 R200.1 | length 173.5
  Top Layer w0.254: C200.2 v1(59.4,92.6) 67.146,92.6 J1.86 ; v1(59.5,77.7) v1(59.5,88) ; R200.1 86.6,11.55 86.6,9.7 ; P203.1 86.6,9.7 ; v1(89.4,9.6) 89.3,9.7 86.6,9.7
  Bottom Layer w0.254: v1(59.4,92.6) 59.5,92.5 v1(59.5,88) ; v1(59.5,77.7) 44.4,77.7 40.7,74 40.7,11.9 49.6,3 70.463,3 70.479,2.984 71.321,2.984 71.337,3 86.9,3 89.4,5.5 v1(89.4,9.6)
Reserve-2: J1.87 P200.1 | length 19.6
  Top Layer w0.254: J1.87 76.493,93.907 76.493,95.97 76.484,95.979 76.484,97.15 82.593,103.059 82.593,104.947 P200.1
Reserve-3: J1.88 P200.2 | length 32.1
  Top Layer w0.254: J1.88 67.076,93.8 64.1,93.8 64.1,103.1 67.5,106.5 71,106.5 74.6,102.9 77.9,102.9 P200.2
Reserve-4: J1.89 P202.1 | length 117
  Top Layer w0.254: P202.1 51.26,9.96 v1(51.3,10) ; v1(51.6,73.4) v1(51.6,94.9) ; J1.89 74.377,95.177 v1(74.6,95.4)
  Bottom Layer w0.254: v1(51.3,10) 51.3,73.1 v1(51.6,73.4) ; v1(51.6,94.9) 52.1,95.4 v1(74.6,95.4)
Servo-Kipp: J1.10 P208.2 | length 57
  Top Layer w0.254: v1(62.5,44.4) 62.516,44.416 67.093,44.416 J1.10 ; v1(65.6,11.4) 65.8,11.2 P208.2
  Bottom Layer w0.254: v1(62.5,44.4) 62.4,44.5 58.1,44.5 56,42.4 56,13.9 58.5,11.4 v1(65.6,11.4)
Starttaster: C201.2 J1.82 P204.1 R201.1 | length 143.3
  Top Layer w0.254: v1(55.5,76.4) C201.2 55.671,90.071 J1.82 ; v1(68.6,8.7) 68.655,8.755 77.14,8.755 ; R201.1 77.14,11.61 77.14,8.755 ; P204.1 77.14,8.755
  Bottom Layer w0.254: v1(55.5,76.4) 55.3,76.6 46.2,76.6 41.6,72 41.6,14.4 47.8,8.2 68.1,8.2 v1(68.6,8.7)
WIFI-RX: J1.246 P201.3 TP200.1 | length 45.1
  Top Layer w0.254: J1.246 32.36,35.97 32.36,33.56 31,32.2 26,32.2 24.74,30.94 P201.3 27.24,27.5 40.7,27.5 42,28.8 54.4,28.8 TP200.1
WIFI-TX: J1.244 P201.4 TP201.1 | length 39.8
  Top Layer w0.254: P201.4 33.8,30 ; J1.244 33.68,30.12 33.8,30 ; TP201.1@61,30 33.8,30
pads on no net: J1. J1.18 J1.19 J1.20 J1.21 J1.22 J1.23 J1.24 J1.25 J1.26 J1.27 J1.28 J1.29 J1.30 J1.31 J1.32 J1.33 J1.36 J1.37 J1.38 J1.39 J1.40 J1.41 J1.42 J1.43 J1.44 J1.45 J1.46 J1.47 J1.48 J1.49 J1.50 J1.51 J1.52 J1.53 J1.54 J1.55 J1.56 J1.57 J1.58 J1.59 J1.60 J1.62 J1.63 J1.64 J1.65 J1.66 J1.67 J1.68 J1.69 J1.70 J1.71 J1.72 J1.73 J1.74 J1.75 J1.76 J1.77 J1.78 J1.90 J1.91 J1.92 J1.93 J1.94 J1.95 J1.96 J1.97 J1.98 J1.100 J1.101 J1.103 J1.104 J1.105 J1.106 J1.107 J1.108 J1.109 J1.110 J1.111 J1.112 J1.113 J1.114 J1.115 J1.116 J1.117 J1.118 J1.119 J1.120 J1.121 J1.122 J1.123 J1.124 J1.125 J1.126 J1.127 J1.128 J1.129 J1.130 J1.131 J1.132 J1.133 J1.134 J1.135 J1.136 J1.137 J1.138 J1.139 J1.140 J1.141 J1.142 J1.143 J1.144 J1.145 J1.146 J1.147 J1.148 J1.149 J1.150 J1.151 J1.152 J1.153 J1.154 J1.155 J1.156 J1.157 J1.158 J1.159 J1.206 J1.207 J1.208 J1.209 J1.210 J1.211 J1.212 J1.213 J1.214 J1.215 J1.216 J1.217 J1.218 J1.219 J1.220 J1.221 J1.222 J1.223 J1.224 J1.226 J1.227 J1.228 J1.229 J1.230 J1.231 J1.232 J1.233 J1.234 J1.235 J1.236 J1.237 J1.238 J1.239 J1.240 J1.241 J1.242 J1.243 J1.245 J1.247 J1.248 J1.249 J1.250 J1.251 J1.252 J1.253 J1.254 J1.255 J1.256 J1.257 J1.258 J1.260 P209.3 P209.4 P209.5 U401.7 U401.9 U401.10 U401.11

## Polygon pours and split planes (outlines as drawn)
GND on Top Layer "Top Layer-No Net" (solid, remove dead copper, pour order 2): 128.9,109 128.9,1.2 129.1,1 1,1 1,109
GND on Bottom Layer "Top Layer-No Net" (solid, remove dead copper, pour order 4): 1.1,108.9 1.3,109.1 129,109.1 129,1 129.1,0.9 0.9,0.9 0.9,108.9 1.1,109.1

## Keep-outs
Keep-Out Layer:
  lines w0.1: 1,4 1,106 4,106 4,109 101.5,109 126,109 126,106 129,106 129,4 126,4 126,1 4,1 4,4 1,4

## Other copper
Top Layer:
  pour cut-out: 0,32.3 46.2,32.3 46.2,0 0,0
Bottom Layer:
  pour cut-out: 0,32.3 46.2,32.3 46.2,0 0,0

## Silkscreen, mask and mechanical layers (free items; w line width, h text height)
Top Overlay:
  text "Res 2,3" at 76.7,101.9 h1
  text "Wifi IO" at 90.3,99.6 h1
  text "Sensor4" at 127,96.2 h1 r90
  text "Sensor1" at 101.5,95.9 h1
  text "Sensor2" at 108.3,95.8 h1
  text "Sensor3" at 115.5,95.8 h1
  text "Stoerung" at 90.9,93.3 h1
  text "Power" at 91.9,86.3 h1
  text "SysP 2018 - Team 10 Chur  / Microcontroller und Sensoren / Version 1.1  / Luzian Weber 27.03.2018" at 7.7,62.4 h2
  text "Enc-Res" at 126.9,61.8 h1 r90
  text "Enc-Turn" at 127,52.3 h1 r90
  text "Enc-Lift" at 126.9,42.5 h1 r90
  text ":)" at 83.4,33.5 h6 r270
  text "Reset" at 53,16.1 h1
  text "Wifi-Modul" at 24.2,4.5 h1
  text "Verbindungsleiste zum Motorentreiber" at 119.7,3.6 h1 r90
  text "Res 4,Sens" at 48.8,2.3 h1
  text "Servo" at 62.1,2.2 h1
  text "Sarttaster" at 71.4,2.2 h1
  text "Res-Taster" at 83,2.2 h1
Mechanical 1:
  the board outline again, w0
Drill Drawing:
  lines w0.1: 1,4 4,4 4,1 126,1 126,4 129,4 129,106 126,106 126,109 101.5,109 4,109 4,106 1,106 1,4

## Text inside footprints (layer, text, board x,y; h text height)
400: Top Overlay "Interstaatliche Hochschule" at 11.298,15.602 h2.25; Top Overlay "für Technik Buchs" at 11.302,13.704 h2.25; Top Overlay "FHO Fachhochschule Ostschweiz" at 11.302,10.839 h1.88; Top Overlay "NTB" at 11.298,18.233 h4.87; Top Overlay "Interstaatliche Hochschule" at 11.298,15.602 h2.25; Top Overlay "für Technik Buchs" at 11.302,13.704 h2.25; Top Overlay "FHO Fachhochschule Ostschweiz" at 11.302,10.839 h1.88; Top Overlay "NTB" at 11.298,18.233 h4.87
J1: Top Overlay "0" at 70.561,37.797 h1.52 r270; Top Overlay "1" at 44.061,104.829 h1.52; Top Overlay "2" at 61.85,39.449 h1.52
P100: Top Overlay "24" at 124.892,6.756 h1.27 r270; Top Overlay "23" at 122.352,6.756 h1.27 r270; Top Overlay "2" at 124.892,38.76 h1.27 r270; Top Overlay "1" at 122.352,38.76 h1.27 r270
P205: Top Overlay "3" at 124.164,44.952 h1.27; Top Overlay "4" at 124.164,47.492 h1.27; Top Overlay "2" at 117.56,47.492 h1.27; Top Overlay "1" at 118.068,44.952 h1.27
P206: Top Overlay "3" at 124.164,53.752 h1.27; Top Overlay "4" at 124.164,56.292 h1.27; Top Overlay "2" at 117.56,56.292 h1.27; Top Overlay "1" at 118.068,53.752 h1.27
P207: Top Overlay "3" at 124.124,63.152 h1.27; Top Overlay "4" at 124.124,65.692 h1.27; Top Overlay "2" at 117.52,65.692 h1.27; Top Overlay "1" at 118.028,63.152 h1.27